# Altium PCB PCI Express_16765X6890_98PIN_Low profile.PCBDOC
Units mm, origin at the board's own origin, x right, y up, seen from the top; angles counter-clockwise.
Board outline 102.15 x 68.9 mm, 4 copper layers (TopLayer, InternalPlane1, InternalPlane2, BottomLayer); 17 components, 57 nets, 202 pads, 43 vias.
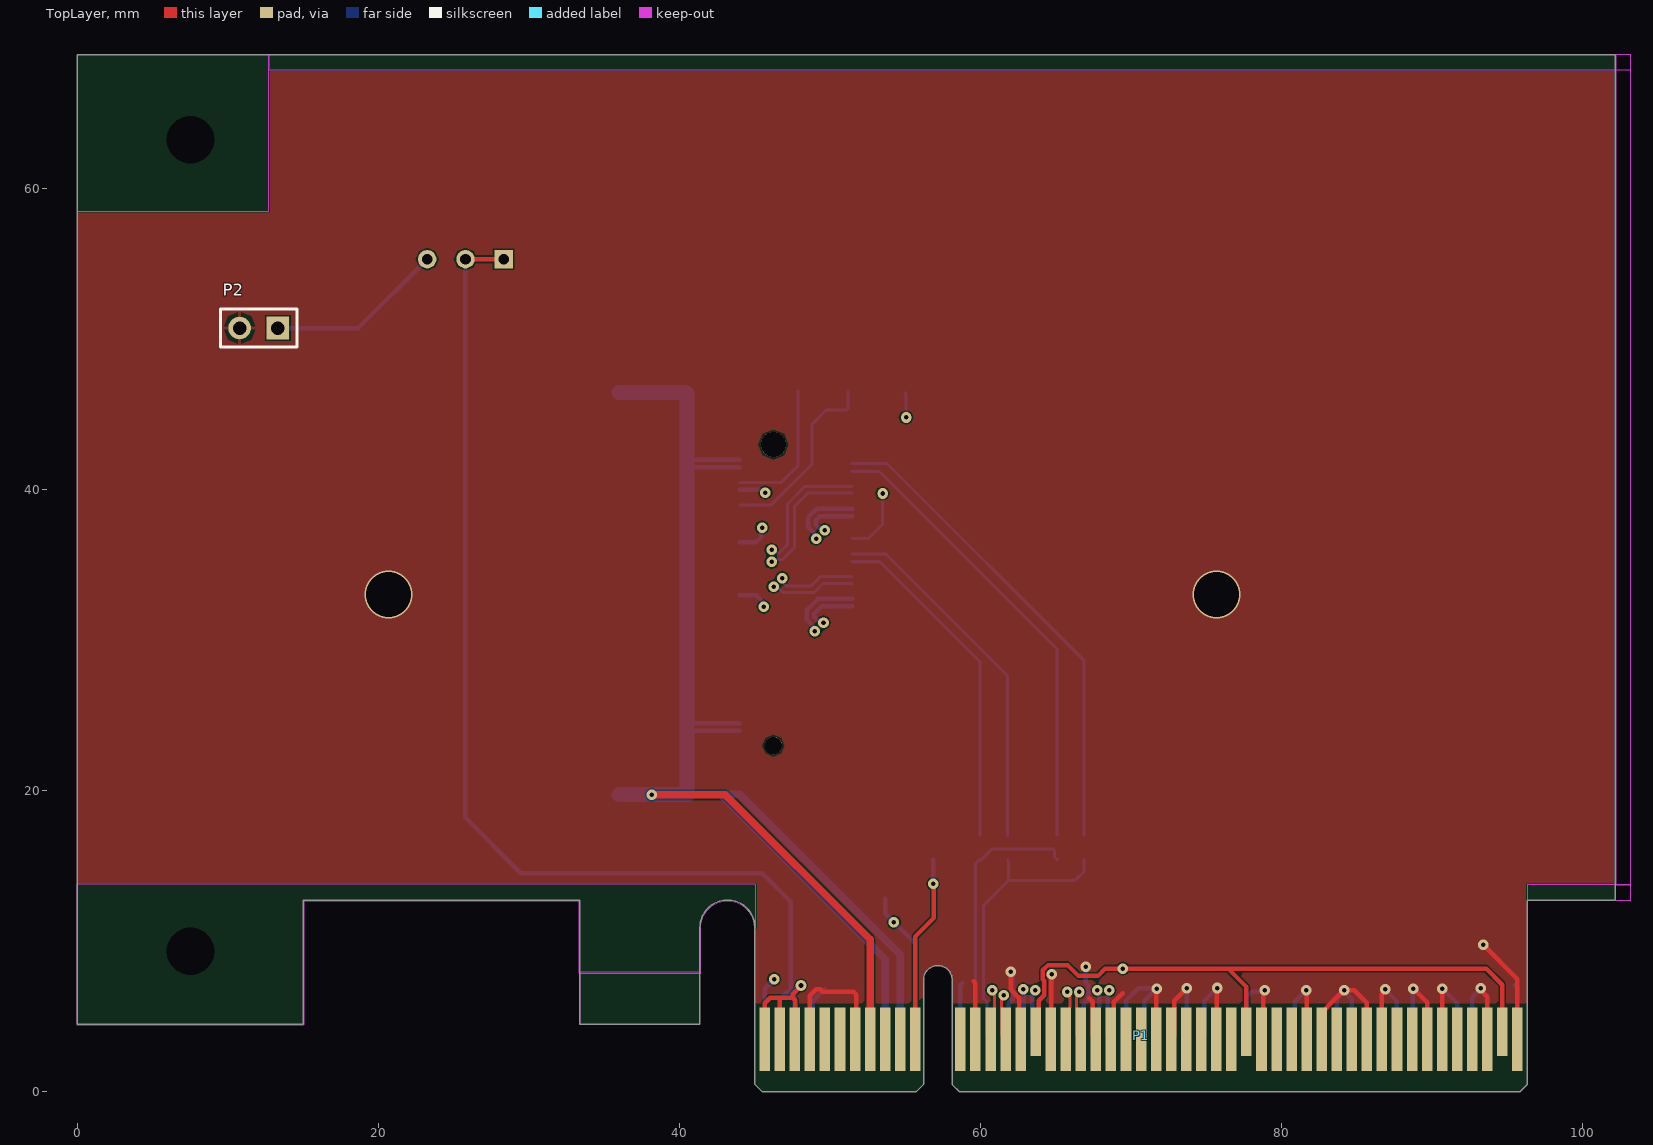
[diagram p0: TopLayer view]
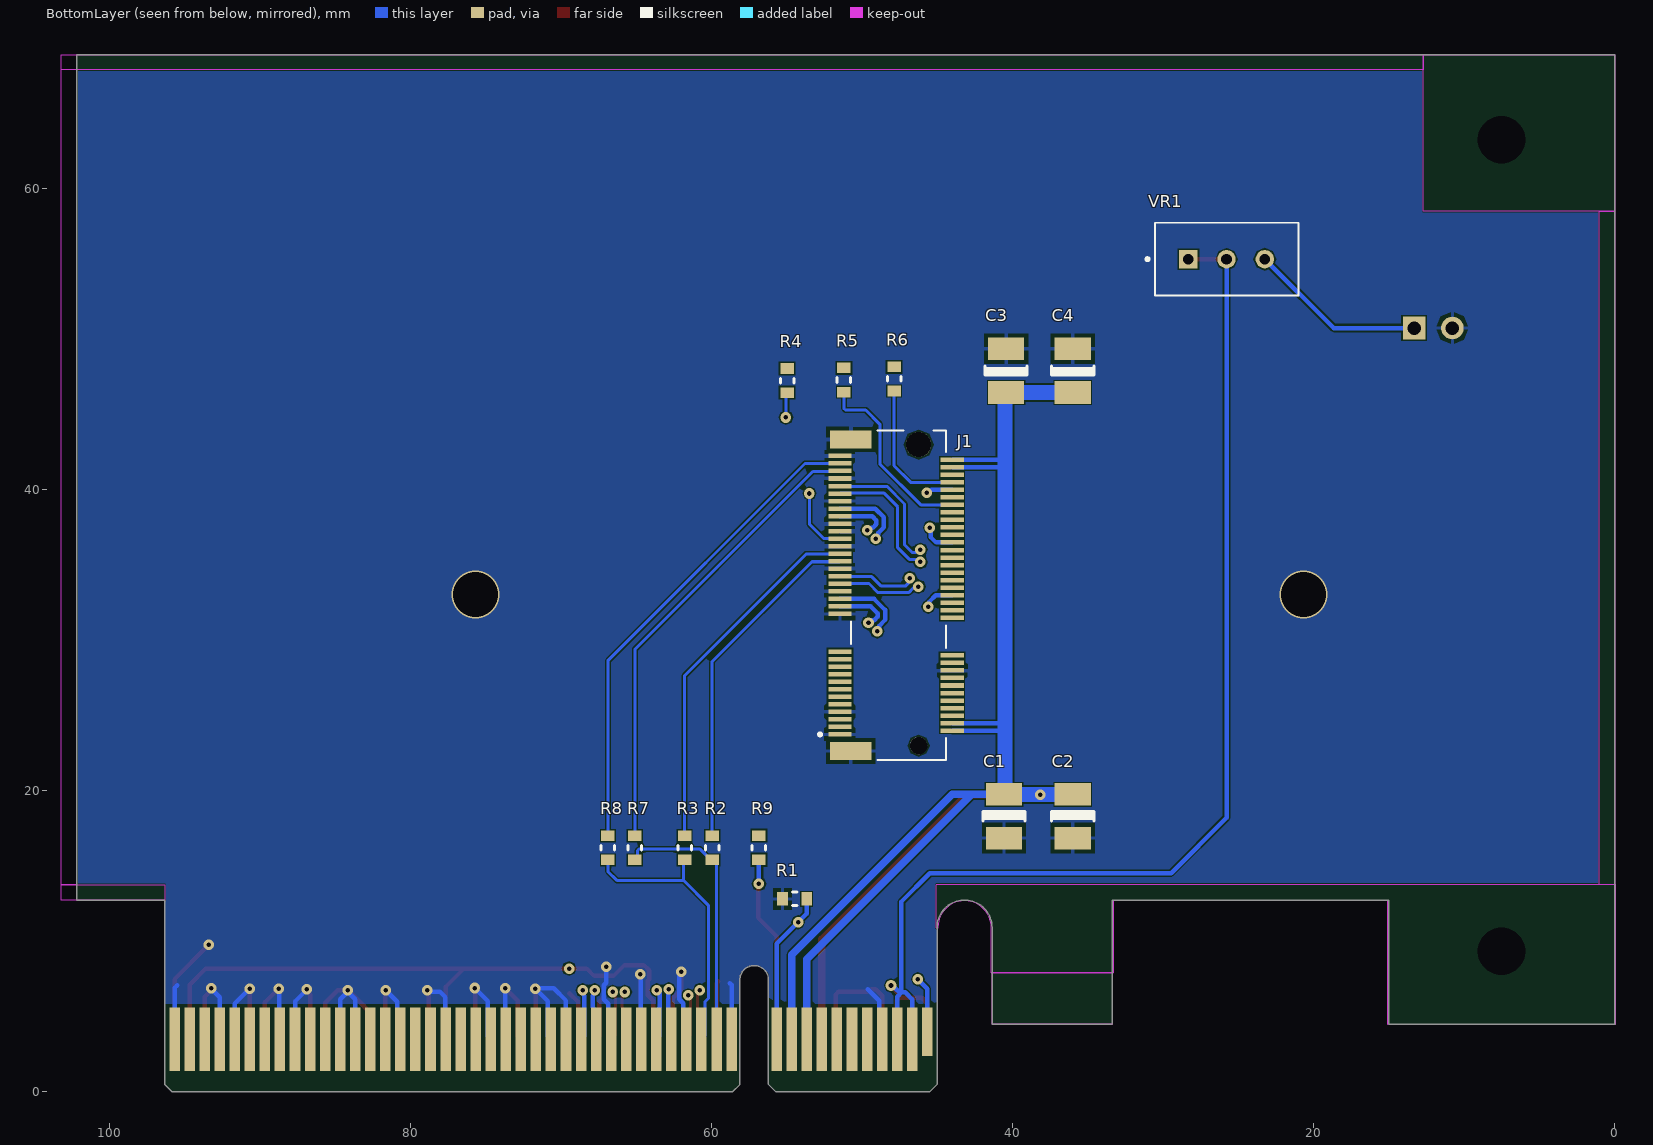
[diagram p1: BottomLayer view, seen from below]
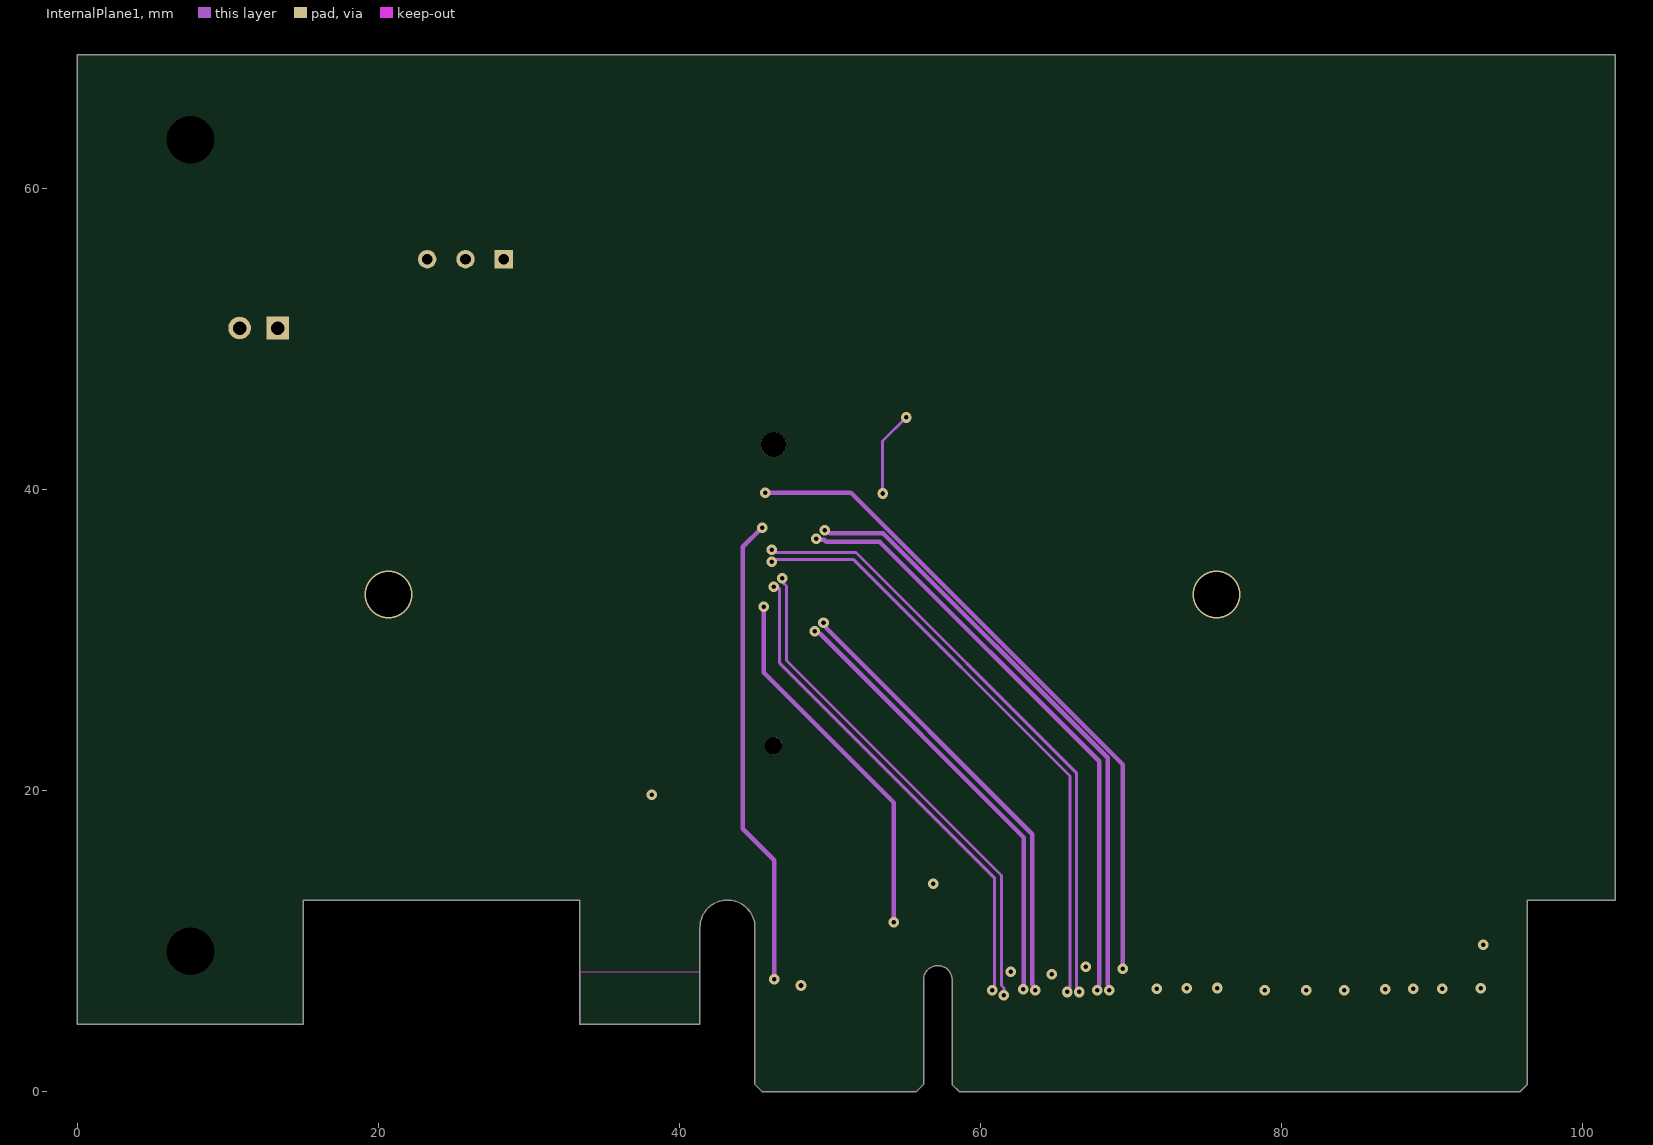
[diagram p2: InternalPlane1]
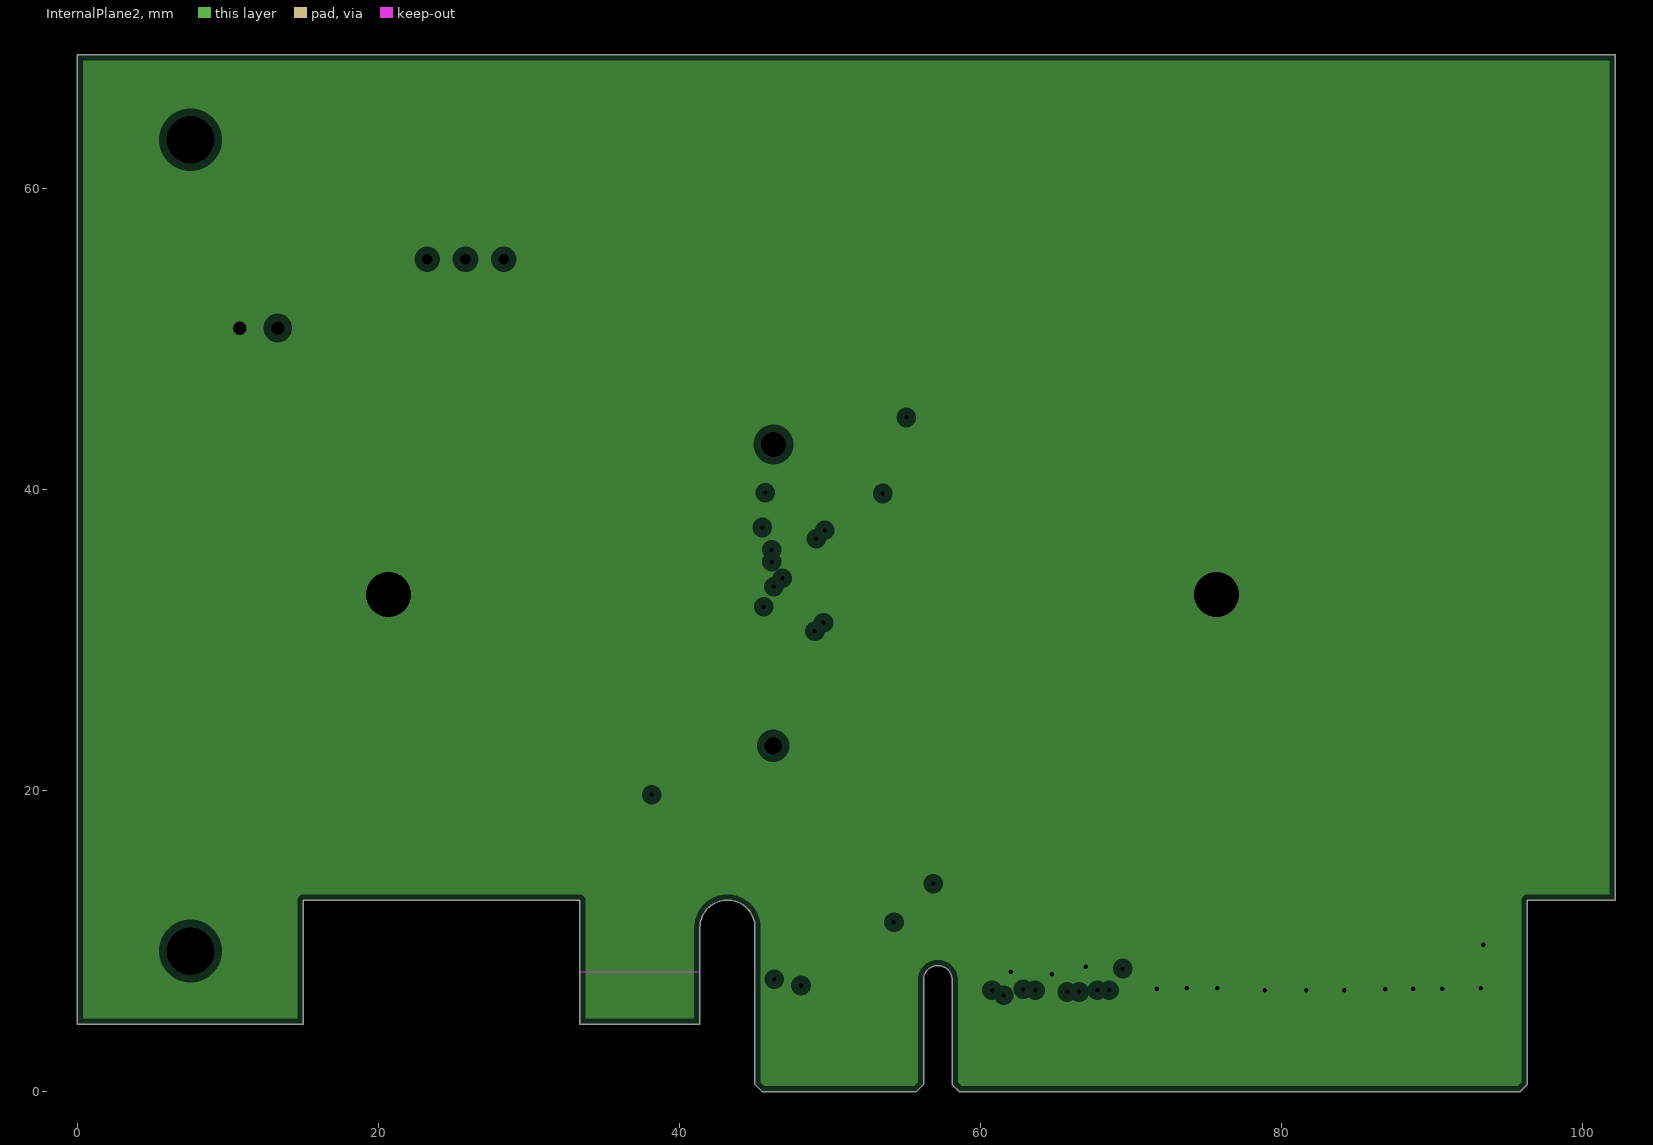
[diagram p3: InternalPlane2, clearances drawn from the general rule]
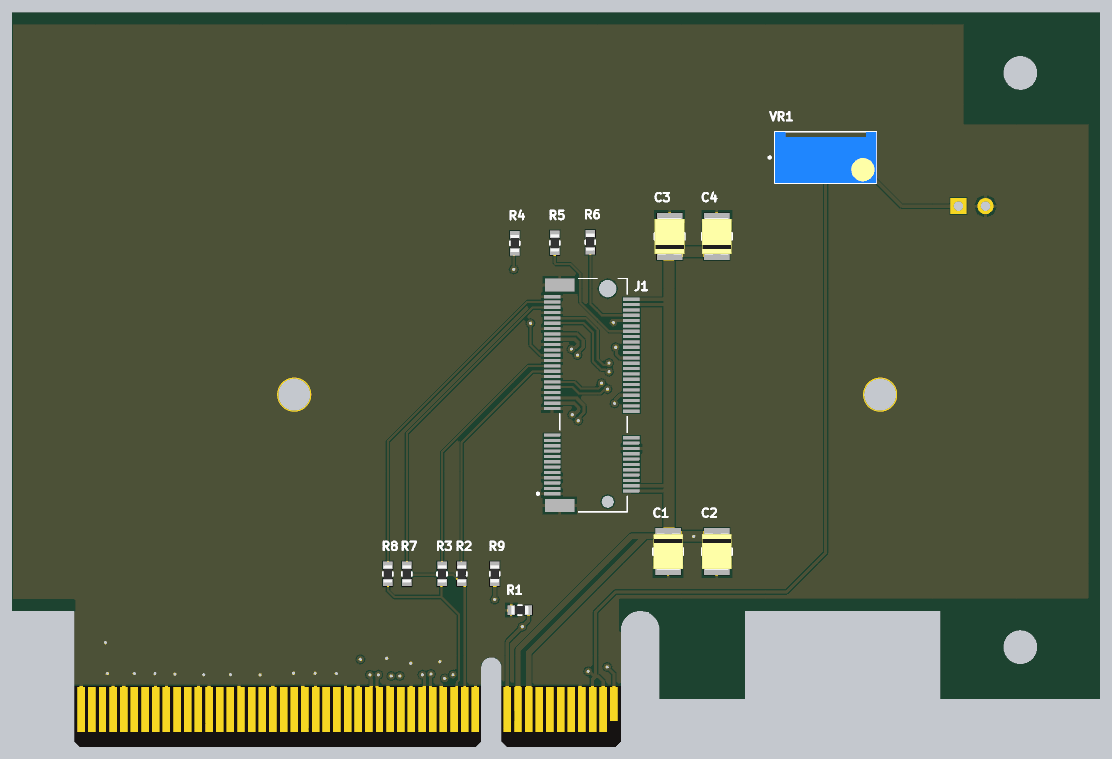
[diagram p4: 3D render of the assembled board from below, using the file's embedded part models]

## Layer stack, top to bottom
TopSolder: solder mask 0.01, Solder Resist, Dk 3.5
TopLayer: signal copper 0.018
Dielectric1: core 0.32, FR-4, Dk 4.8
InternalPlane1: signal copper 0.035
Dielectric2: prepreg 0.32, FR-4, Dk 4.8
InternalPlane2: plane copper 0.035, net GND
Dielectric3: core 0.32, FR-4, Dk 4.8
BottomLayer: signal copper 0.018
BottomSolder: solder mask 0.01, Solder Resist, Dk 3.5

## Board outline
0,4.5 15,4.5 15,12.75 33.35,12.75 33.35,4.5 41.35,4.5 41.35,10.925 cw(c43.175,10.925) 45,10.925 45,0.5 45.5,0 55.7,0 56.2,0.5 56.2,7.45 cw(c57.15,7.45) 58.1,7.45 58.1,0.5 58.6,0 95.8,0 96.3,0.5 96.3,12.75 102.15,12.75 102.15,68.9 0,68.9
cut-out: 131.214,21.723
cut-out: 124.387,5.143

## Design rules (kind name [scope] priority, off if disabled: settings)
Clearance [All] p1: gap=0.1 ignorepadtopadclearanceinfootprint=FALSE
DiffPairsRouting [All] p1: maxlimit=0.254 minlimit=0.2 mostfreqgap=0.254 toplayer_minwidth=0.15 toplayer_maxwidth=0.381 toplayer_prefwidth=0.381 midlayer1_minwidth=0.15 midlayer1_maxwidth=0.381 midlayer1_prefwidth=0.381 bottomlayer_minwidth=0.15 bottomlayer_maxwidth=0.381 bottomlayer_prefwidth=0.381 maxuncoupledlength=12.7
FabricationTestPointUsage TestPointUsage [All] p1: valid=0 allowmultiple=FALSE
FabricationTestpoint Testpoint [All] p1: side=3 testpointundercomponent=TRUE minsize=1.016 maxsize=2.54 preferedsize=1.524 minholesize=0.508 maxholesize=1.016 preferedholesize=0.813 testpointgrid=0.025 allowsidetop=TRUE allowsidebottom=TRUE usegrid=TRUE gridtolerance=0
Height "PCI Express, Page 84, \"Component Height Constraints\" for solder side" [OnBottomLayer] p1: minheight=0 maxheight=2.67 prefheight=2.67
Height "PCI Express, Page 84, \"Component Height Constraints\" for component side" [OnTopLayer] p2: minheight=0 maxheight=14.47 prefheight=14.47
MinimumSolderMaskSliver [All] p1: minsoldermaskwidth=0.08
PlaneClearance [All] p1: clearance=0.5
PlaneConnect [All] p1: planeconnectstyle=Relief reliefexpansion=0.508 reliefentries=4 reliefconductorwidth=0.254 reliefairgap=0.254
PolygonConnect [All] p1: connectstyle=Relief reliefconductorwidth=0.254 reliefentries=4 polygonreliefangle="90 Angle" airgapwidth=0.254
RoutingVias [All] p1: holewidth=0.711 width=1.27 viastyle="Through Hole" minholewidth=0.3 minwidth=0.7 maxholewidth=0.711 maxwidth=1.27
SilkToSolderMaskClearance SilkscreenOverComponentPads [IsPad] p1: minsilkscreentomaskgap=0.254 clearancetoexposedcopper=TRUE
SolderMaskExpansion [All] p1: expansion=0 istentingtop=FALSE
Width [All] p1: maxlimit=3 minlimit=0.15 preferedwidth=0.254
22 further rules are at their usual default settings.

## Classes and differential pairs
component class "PCI Express_16765X6890_98PIN_Low profile": C1 C2 C3 C4 J1 P2 R1 R2 R3 R4 R5 R6 R7 R8 R9 VR1
net class JTAG[1..5]: JTAG1 JTAG2 JTAG3 JTAG4 JTAG5
component class U_CON_PCI_Express_X8_98PIN: P1
component class "Edge Connector": P1
differential pair PET7: +PET7_P -PET7_N
differential pair PET6: +PET6_P -PET6_N
differential pair PET5: +PET5_P -PET5_N
differential pair PET4: +PET4_P -PET4_N
differential pair PET3: +PET3_P -PET3_N
differential pair PET2: +PET2_P -PET2_N
differential pair PET1: +PET1_P -PET1_N
differential pair PET0: +PET0_P -PET0_N
differential pair PER7: +PER7_P -PER7_N
differential pair PER6: +PER6_P -PER6_N
differential pair PER5: +PER5_P -PER5_N
differential pair PER4: +PER4_P -PER4_N
differential pair PER3: +PER3_P -PER3_N
differential pair PER2: +PER2_P -PER2_N
differential pair PER1: +PER1_P -PER1_N
differential pair PER0: +PER0_P -PER0_N

## Components (designator, comment, footprint, x,y, rotation, side; value= is the part's Value field where it differs from the comment)
C1 "TECAP B 10u 16V" "TECAP B" 40.55,18.315 r270 bottom
C2 "TECAP B 10u 16V" "TECAP B" 35.986,18.315 r270 bottom
C3 "TECAP B 10u 16V" "TECAP B" 40.412,47.911 r90 bottom
C4 "TECAP B 10u 16V" "TECAP B" 35.986,47.911 r90 bottom
J1 "SM3ZS067U310ABR1200" JAE_SM3ZS067U310ABR1200 47.975,33 r90 bottom
P1 "PCIeX8-GF-2D-1000-1K-O98" PCIeX8-GF-2D-1000-1K-O98 55.15,3.5 r0 top locked
P2 "Header 2" HDR1X2 13.307,50.745 r180 top
R1 "0603 10k" RESCHIP0603 54.469,12.821 r0 bottom
R2 "50 Ом" RESCHIP0603 59.935,16.22 r90 bottom
R3 "50 Ом" RESCHIP0603 61.774,16.22 r90 bottom
R4 "50 Ом" RESCHIP0603 54.955,47.258 r270 bottom
R5 "50 Ом" RESCHIP0603 51.195,47.293 r90 bottom
R6 "50 Ом" RESCHIP0603 47.857,47.363 r90 bottom
R7 "50 Ом" RESCHIP0603 65.081,16.22 r90 bottom
R8 "50 Ом" RESCHIP0603 66.868,16.22 r90 bottom
R9 "50 Ом" RESCHIP0603 56.843,16.225 r90 bottom
VR1 "3296W-1-103" TRIM_3296W-1-103 25.77,55.317 r180 bottom

## Footprints (in the part's own frame and the unit in brackets; to place one, negate y for a bottom-side part, rotate by r counter-clockwise, add the part's x,y. Pads: shape width x height; smd on the part's side, far side on the other; paste and mask are expansions set on the pad)
HDR1X2 [mm] "Connector; Header; 2 Position"
  rect 1.5x1.5 hole 0.9: 1(0,0)
  round 1.5 hole 0.9: 2(2.54,0)
  silkscreen extent -1.27,-1.27 3.81,1.27
JAE_SM3ZS067U310ABR1200 [mm]
  rect 0.3x1.55 smd: 1(-9.25,3.475) 2(-9,-3.975) 3(-8.75,3.475) 4(-8.5,-3.975) 5(-8.25,3.475) 6(-8,-3.975) 7(-7.75,3.475) 8(-7.5,-3.975) 9(-7.25,3.475) 10(-7,-3.975) 11(-6.75,3.475) 12(-6.5,-3.975) 13(-6.25,3.475) 14(-6,-3.975) 15(-5.75,3.475) 16(-5.5,-3.975) 17(-5.25,3.475) 18(-5,-3.975) 19(-4.75,3.475) 20(-4.5,-3.975) 21(-4.25,3.475) 22(-4,-3.975) 23(-3.75,3.475) 32(-1.5,-3.975) 33(-1.25,3.475) 34(-1,-3.975) 35(-0.75,3.475) 36(-0.5,-3.975) 37(-0.25,3.475) 38(0,-3.975) 39(0.25,3.475) 40(0.5,-3.975) 41(0.75,3.475) 42(1,-3.975) 43(1.25,3.475) 44(1.5,-3.975) 45(1.75,3.475) 46(2,-3.975) 47(2.25,3.475) 48(2.5,-3.975) 49(2.75,3.475) 50(3,-3.975) 51(3.25,3.475) 52(3.5,-3.975) 53(3.75,3.475) 54(4,-3.975) 55(4.25,3.475) 56(4.5,-3.975) 57(4.75,3.475) 58(5,-3.975) 59(5.25,3.475) 60(5.5,-3.975) 61(5.75,3.475) 62(6,-3.975) 63(6.25,3.475) 64(6.5,-3.975) 65(6.75,3.475) 66(7,-3.975) 67(7.25,3.475) 68(7.5,-3.975) 69(7.75,3.475) 70(8,-3.975) 71(8.25,3.475) 72(8.5,-3.975) 73(8.75,3.475) 74(9,-3.975) 75(9.25,3.475)
  rect 1.2x2.75 smd: S1(-10.35,2.75) S2(10.35,2.75)
  round 1.15 hole 1.15 unplated: ""(-10,-1.75)
  round 1.65 hole 1.65 unplated: ""(10,-1.75)
  silkscreen extent -10.95,-3.58 10.95,4.9
PCIeX8-GF-2D-1000-1K-O98 [mm] "Golden finger, PCIeX8, Dual, Opposite, Pitch 1mm, 98-Position"
  rect 0.7x3.2 smd far side paste-1: A1(-9.5,0.5)
  rect 0.7x4.2 smd far side paste-1: A2(-8.5,0) A3(-7.5,0) A4(-6.5,0) A5(-5.5,0) A6(-4.5,0) A7(-3.5,0) A8(-2.5,0) A9(-1.5,0) A10(-0.5,0) A11(0.5,0) A12(3.5,0) A13(4.5,0) A14(5.5,0) A15(6.5,0) A16(7.5,0) A17(8.5,0) A18(9.5,0) A19(10.5,0) A20(11.5,0) A21(12.5,0) A22(13.5,0) A23(14.5,0) A24(15.5,0) A25(16.5,0) A26(17.5,0) A27(18.5,0) A28(19.5,0) A29(20.5,0) A30(21.5,0) A31(22.5,0) A32(23.5,0) A33(24.5,0) A34(25.5,0) A35(26.5,0) A36(27.5,0) A37(28.5,0) A38(29.5,0) A39(30.5,0) A40(31.5,0) A41(32.5,0) A42(33.5,0) A43(34.5,0) A44(35.5,0) A45(36.5,0) A46(37.5,0) A47(38.5,0) A48(39.5,0) A49(40.5,0)
  rect 0.7x4.2 smd paste-1: B1(-9.5,0) B2(-8.5,0) B3(-7.5,0) B4(-6.5,0) B5(-5.5,0) B6(-4.5,0) B7(-3.5,0) B8(-2.5,0) B9(-1.5,0) B10(-0.5,0) B11(0.5,0) B12(3.5,0) B13(4.5,0) B14(5.5,0) B15(6.5,0) B16(7.5,0) B18(9.5,0) B19(10.5,0) B20(11.5,0) B21(12.5,0) B22(13.5,0) B23(14.5,0) B24(15.5,0) B25(16.5,0) B26(17.5,0) B27(18.5,0) B28(19.5,0) B29(20.5,0) B30(21.5,0) B32(23.5,0) B33(24.5,0) B34(25.5,0) B35(26.5,0) B36(27.5,0) B37(28.5,0) B38(29.5,0) B39(30.5,0) B40(31.5,0) B41(32.5,0) B42(33.5,0) B43(34.5,0) B44(35.5,0) B45(36.5,0) B46(37.5,0) B47(38.5,0) B49(40.5,0)
  rect 0.7x3.2 smd paste-1: B17(8.5,0.5) B31(22.5,0.5) B48(39.5,0.5)
RESCHIP0603 [mm] "Chip Resistor, 2-Leads, Body 1,6x0,8mm"
  rect 0.7x0.9 smd mask+0.06: 1(-0.8,0) 2(0.8,0)
  silkscreen extent -0.15,-0.45 0.15,0.45, body extent -0.8,-0.4 0.8,0.4, height 0.4
"TECAP B" [mm] "Chip Capacitor, 2-Leads, Body 3,5x2,8mm"
  rect 1.5x2.4 smd mask+0.06: 1(-1.45,0) 2(1.45,0)
  silkscreen extent -0.3,-1.4 0.3,1.4, body extent -1.75,-1.4 1.75,1.4, height 1.92
TRIM_3296W-1-103 [mm]
  rect 1.218x1.218 hole 0.71: 1(-2.54,0)
  round 1.218 hole 0.71: 2(0,0) 3(2.54,0)
  silkscreen extent -5.35,-2.41 4.76,2.42, body extent -4.77,-2.42 4.76,2.41, height 11.55

## Part data
C1 C2 C3 C4: library part "Cap T", "Solid Tantalum Surface Mount Capacitors", Voltage=16V, Type="TECAP B"
J1: "67 Position Female Connector M.2 (NGFF) Mini Card Gold 0.020 (0.50mm)", Package=None, Availability=Warning, Check_prices=https://www.snapeda.com/parts/SM3ZS067U310ABR1200/JAE%20Electronics/view-part/652226/?ref=eda, MF="JAE Electronics", MP=SM3ZS067U310ABR1200, Price=None, Purchase-URL=https://pricing.snapeda.com/search/part/SM3ZS067U310ABR1200/?ref=eda, SnapEDA_Link=https://www.snapeda.com/parts/SM3ZS067U310ABR1200/JAE%20Electronics/view-part/652226/?ref=snap
P1: library part CMP-0001-00032-2, "Golden finger, PCIeX8, Dual, Opposite, Pitch 1mm, 98-Position", ClassName="Edge Connector", Datasheet Version="rev2.0, Apr-2007", Mating Connector=Molex-87715-9205, Package Reference=PCIeX8-GF-2D-1000-1K-O98, Publisher=Altium
P2: "Header, 2-Pin", LatestRevisionDate=17-Jul-2002, LatestRevisionNote="Re-released for DXP Platform.", Publisher="Altium Limited"
R1: library part Res, "Resistor", Power_W=0,065, Tolerance_Percent=5, Body=0603, Class="Электронные компоненты", Installation=SMD, Ordering_Information="0603, 10k, 5%", Pins=2, SubClass=Резисторы
R2 R3 R4 R5 R6 R7 R8 R9: library part Res, "Резистор SMD R0603", Tolerance=%, PWR=Value, Type=0603
VR1: "10 kOhms 0,5W, 1 / 2W PC Pinos atravÃ©s de orifÃ­cio e aparador de potenciÃ´metro Cermet 25 Ajuste superior", Package="SOT-23-5 Bourns", Availability=Warning, Check_prices=https://www.snapeda.com/parts/3296W-1-103/Bourns/view-part/421595/?ref=eda, MF=Bourns, MP=3296W-1-103, Price=None, Purchase-URL=https://pricing.snapeda.com/search/part/3296W-1-103/?ref=eda, SnapEDA_Link=https://www.snapeda.com/parts/3296W-1-103/Bourns/view-part/421595/?ref=snap

## Free pads (board coordinates)
  round 2.88 hole 3.18 unplated: MH1(7.5,9.35) MH2(7.5,63.25)

## Via types
v1: diameter 0.7, hole 0.3, TopLayer to BottomLayer, tented both sides, 41 vias
v2: diameter 3.2, hole 3, TopLayer to BottomLayer, 2 vias

## Nets (pads, with @x,y where several pads share a name; then routed paths per layer and width w, separated by ;. In a path a pad name is that pad's centre, name@x,y a point inside that pad or via, vN(x,y) a via of type N, cw(c..) or ccw(c..) an arc to the next point about the centre after c; other vN are vias at no path point)
3.3VAUX: P1.B10
+3.3V: C1.1 C2.1 C3.1 C4.1 J1.2 J1.4 J1.72 J1.74 P1.A9 P1.A10 P1.B8 | length 122
  TopLayer w0.5: v1(38.151,19.738) 43.039,19.738 52.65,10.127 P1.B8
  BottomLayer w0.3: 40.481,23.99 40.491,24 J1.2 ; 40.481,24.534 40.515,24.5 J1.4 ; 40.481,41.507 40.488,41.5 J1.72 ; 40.481,42.019 40.5,42 J1.74
  BottomLayer w0.5: C2.1 36.013,19.738 v1(38.151,19.738) ; C1.1 42.709,19.765 ; P1.A9 53.65,8.824 42.709,19.765 ; P1.A10 54.65,9.105 43.99,19.765 42.709,19.765
  BottomLayer w1: C2.1 C1.1 40.481,19.834 40.481,23.99 40.481,24.534 40.481,41.507 40.481,42.019 40.481,46.392 C3.1 C4.1
+12V: P1.A2 P1.A3 P1.B1 P1.B2 P1.B3 VR1.1 VR1.2 | length 88.4
  TopLayer w0.3: VR1.2 VR1.1 ; P1.B1 45.65,5.899 46.018,6.267 46.766,6.267 ; P1.B2 46.65,6.151 46.766,6.267 ; P1.B3 47.689,3.539 47.689,6.091 47.513,6.267 ; v1(48.061,7.072) 48.061,7.036 47.513,6.488 47.513,6.267 ; 46.766,6.267 47.513,6.267
  BottomLayer w0.3: VR1.2 25.77,18.222 29.454,14.538 45.479,14.538 47.366,12.651 47.366,6.729 47.366,6.613 ; P1.A2 46.65,6.145 47.118,6.613 47.366,6.613 ; P1.A3 47.65,6.329 47.366,6.613 ; v1(48.061,7.072) 47.953,7.072 47.61,6.729 47.483,6.729 47.366,6.613
GND: C1.2 C2.2 C3.2 C4.2 J1.1 J1.7 J1.18 J1.33 J1.39 J1.45 J1.51 J1.55 J1.57 J1.63 J1.69 J1.75 J1.S1 J1.S2 P1.A4 P1.A12 P1.A15 P1.A18 P1.A20 P1.A23 P1.A24 P1.A27 P1.A28 P1.A31 P1.A34 P1.A37 P1.A38 P1.A41 P1.A42 P1.A45 P1.A46 P1.A49 P1.B4 P1.B7 P1.B13 P1.B16 P1.B18 P1.B21 P1.B22 P1.B25 P1.B26 P1.B29 P1.B32 P1.B35 P1.B36 P1.B39 P1.B40 P1.B43 P1.B44 P1.B47 P1.B49 P2.2 R1.2 | length 145.8
  TopLayer w0.3: P1.B4 48.65,6.382 49.08,6.812 49.328,6.812 49.499,6.641 51.563,6.641 51.739,6.465 51.739,3.589 P1.B7 ; 59.536,7.347 59.65,7.233 P1.B13 ; v1(61.979,7.992) 61.979,6.817 62.569,6.227 62.569,3.581 P1.B16 ; P1.B18 64.684,3.535 64.684,7.798 v1(64.719,7.833) ; 67.207,6.238 67.45,5.995 67.45,3.7 P1.B21 ; P1.B22 68.85,3.7 68.85,5.983 69.431,6.564 ; P1.B25 71.672,3.522 71.672,6.848 v1(71.694,6.87) ; P1.B26 72.85,3.7 72.85,6.048 v1(73.689,6.887) ; P1.B29 75.684,3.534 75.684,6.871 v1(75.718,6.905) ; P1.B32 78.78,3.63 78.78,6.671 v1(78.857,6.748) ; v1(81.631,6.766) 81.64,6.757 81.64,3.51 P1.B35 ; P1.B36 82.65,5.25 83.05,5.65 83.05,5.704 84.112,6.766 84.813,6.766 85.25,6.329 85.65,5.929 P1.B39 ; P1.B40 86.65,6.494 86.856,6.7 v1(86.856,6.808) ; v1(88.726,6.869) 89.65,5.945 P1.B43 ; P1.B44 90.653,3.503 90.653,6.866 v1(90.656,6.869) ; v1(93.204,6.877) 93.204,6.769 93.65,6.323 P1.B47 ; v1(93.375,9.773) 95.65,7.498 P1.B49
  BottomLayer w0.3: P1.A4 48.835,3.685 48.835,6.05 49.598,6.813 ; P1.A12 58.65,7.106 58.766,7.222 ; P1.A15 61.85,3.7 61.85,5.883 62.133,6.166 62.133,7.838 v1(61.979,7.992) ; P1.A18 64.684,3.535 64.684,7.798 v1(64.719,7.833) ; P1.A20 66.85,3.7 66.85,5.855 67.148,6.153 67.148,7.09 66.979,7.259 v1(66.979,8.304) ; P1.A23 69.65,6.074 70.463,6.887 71.677,6.887 v1(71.694,6.87) 70.85,6.026 70.85,3.7 P1.A24 ; P1.A27 73.67,3.52 73.67,6.868 v1(73.689,6.887) ; P1.A28 74.85,3.7 74.85,6.037 v1(75.718,6.905) ; P1.A31 77.666,3.516 77.666,6.303 78.034,6.671 78.78,6.671 v1(78.857,6.748) ; P1.A34 80.85,3.7 80.85,5.985 v1(81.631,6.766) ; P1.A37 83.65,6.162 v1@84.146,6.658 ; v1(84.146,6.766) v1@84.146,6.658 ; P1.A38 84.65,6.154 v1@84.146,6.658 ; v1(86.856,6.808) 87.65,6.014 P1.A41 ; P1.A42 88.688,3.538 88.688,6.831 v1(88.726,6.869) ; v1(90.656,6.869) 91.65,5.875 P1.A45 ; P1.A46 92.65,6.3 93.204,6.854 v1(93.204,6.877) ; 95.478,7.082 95.65,6.91 P1.A49
  other v2: 20.652,33.052 75.652,33.052
JTAG1: P1.B9
JTAG2: P1.A5
JTAG3: P1.A6
JTAG4: P1.A7
JTAG5: P1.A8
NetJ1_47: J1.47 R2.2 | length 22.8
  BottomLayer w0.2: J1.47 51.48,35.22 53.308,35.22 59.935,28.593 R2.2
NetJ1_49: J1.49 R3.2 | length 24.3
  BottomLayer w0.2: J1.49 53.674,35.75 61.774,27.65 R3.2
NetJ1_53: J1.53 R4.2 | length 11.9
  InternalPlane1 w0.2: v1(53.477,39.754) 53.477,43.235 v1(55.045,44.803)
  BottomLayer w0.2: J1.53 52.516,36.75 53.477,37.711 v1(53.477,39.754) ; R4.2 55.045,46.368 v1(55.045,44.803)
NetJ1_62: J1.62 R5.1 | length 12.5
  BottomLayer w0.2: J1.62 46.081,39 48.801,41.72 48.801,44.359 49.74,45.298 51.078,45.298 51.195,45.415 R5.1
NetJ1_68: J1.68 R6.1 | length 9.3
  BottomLayer w0.2: J1.68 46.756,40.5 47.859,41.603 47.859,44.08 47.857,44.082 R6.1
NetJ1_71: J1.71 R7.2 | length 30.9
  BottomLayer w0.2: J1.71 51.478,41.222 53.253,41.222 65.081,29.394 R7.2
NetJ1_73: J1.73 R8.2 | length 32.5
  BottomLayer w0.2: J1.73 53.767,41.75 66.868,28.649 R8.2
NetP2_1: P2.1 VR1.3 | length 11.8
  BottomLayer w0.3: P2.1 18.658,50.745 VR1.3
PER0_N: J1.35 P1.A17 | length 37
  InternalPlane1 w0.3: 49.733,30.82 63.427,17.126 63.427,7.13 63.473,7.083 63.473,6.831 63.55,6.754 v1(63.621,6.754)
  BottomLayer w0.3: v1(49.555,31.173) 49.446,31.173 49.287,31.332 49.183,31.332 48.955,31.561 48.955,31.809 49.396,32.25 J1.35 ; v1(63.621,6.754) 63.427,6.56 63.427,5.874 63.427,5.626 63.45,5.603 63.45,3.7 P1.A17
PER0_P: J1.37 P1.A16 | length 37.6
  InternalPlane1 w0.3: 49.342,30.428 62.873,16.897 62.873,7.13 62.827,7.083 62.827,6.831 62.821,6.836 v1(62.821,6.824)
  BottomLayer w0.3: v1(48.989,30.607) 48.989,30.715 48.829,30.875 48.829,30.979 48.455,31.353 48.455,32.016 49.188,32.75 J1.37 ; P1.A16 62.85,3.7 62.85,5.603 62.873,5.626 62.873,6.104 v1@62.873,6.824
PER1_N: J1.59 P1.A22 | length 47.5
  InternalPlane1 w0.3: v1(49.63,37.327) 49.738,37.327 49.955,37.109 53.509,37.109 68.427,22.191 68.427,7.128 68.473,7.081 68.473,6.829 v1(68.55,6.752)
  BottomLayer w0.3: v1(49.63,37.327) 49.521,37.327 49.362,37.486 49.258,37.486 49.03,37.715 49.03,37.963 49.317,38.25 J1.59 ; v1(68.55,6.752) 68.473,6.675 68.473,6.423 68.427,6.376 68.427,5.874 68.427,5.626 68.45,5.603 68.45,3.7 P1.A22
PER1_P: J1.61 P1.A21 | length 48.4
  InternalPlane1 w0.3: v1(49.064,36.761) 49.141,36.684 49.597,36.684 49.726,36.555 53.28,36.555 67.873,21.962 67.873,7.128 67.827,7.081 67.827,6.829 v1(67.75,6.752)
  BottomLayer w0.3: v1(49.064,36.761) 49.064,36.869 48.904,37.029 48.904,37.133 48.53,37.507 48.53,38.17 49.109,38.75 J1.61 ; P1.A21 67.85,3.7 67.85,5.603 67.873,5.626 67.873,6.104 67.873,6.376 67.827,6.423 67.827,6.675 v1(67.75,6.752)
PER2_N: P1.A26
PER2_P: P1.A25
PER3_N: P1.A30
PER3_P: P1.A29
PER4_N: P1.A36
PER4_P: P1.A35
PER5_N: P1.A40
PER5_P: P1.A39
PER6_N: P1.A44
PER6_P: P1.A43
PER7_N: P1.A48
PER7_P: P1.A47
PERST#: J1.38 P1.A11 R1.1 | length 36.7
  InternalPlane1 w0.3: v1(45.583,32.231) 45.583,27.86 54.237,19.206 v1(54.237,11.272)
  BottomLayer w0.3: J1.38 45.085,33 45.506,32.579 45.506,32.308 v1(45.583,32.231) ; R1.1 53.669,11.84 v1(54.237,11.272) 55.65,9.859 P1.A11
PET0_N: J1.43 P1.B15 | length 42.6
  TopLayer w0.2: v1(61.533,6.415) 61.533,6.611 61.55,6.628 61.377,6.455 61.377,5.8 61.377,5.617 61.4,5.594 61.4,3.75 P1.B15
  InternalPlane1 w0.2: v1(46.811,34.132) 46.907,34.036 46.907,33.792 47.095,33.603 47.095,28.667 61.377,14.385 61.377,7.071 61.55,6.898 61.533,6.881 v1(61.533,6.415)
  BottomLayer w0.2: v1(46.811,34.132) 46.907,34.036 46.907,33.792 47.077,33.621 48.734,33.621 49.34,34.227 51.427,34.227 J1.43
PET0_P: J1.41 P1.B14 | length 42.2
  TopLayer w0.2: P1.B14 60.9,3.75 60.9,5.594 60.923,5.617 60.923,5.988 60.923,6.455 60.75,6.628 v1(60.75,6.763)
  InternalPlane1 w0.2: v1(46.245,33.566) 46.341,33.47 46.585,33.47 46.641,33.415 46.641,28.479 60.923,14.197 60.923,7.071 60.75,6.898 v1(60.75,6.763)
  BottomLayer w0.2: v1(46.245,33.566) 46.341,33.47 46.585,33.47 46.889,33.167 48.922,33.167 49.528,33.773 51.409,33.773 J1.41@51.45,33.732
PET1_N: J1.67 P1.B20 | length 52.4
  TopLayer w0.2: 66.377,6.333 66.377,5.8 66.377,5.617 66.4,5.594 66.4,3.75 P1.B20
  InternalPlane1 w0.2: 46.412,35.837 51.716,35.837 66.377,21.176 66.377,6.947 66.548,6.776 v1(66.548,6.641)
  BottomLayer w0.2: v1(46.104,36.01) 46.239,36.01 46.412,35.837 46.654,35.837 47.16,36.343 47.16,39.058 48.329,40.227 51.427,40.227 J1.67
PET1_P: J1.65 P1.B19 | length 51.7
  TopLayer w0.2: P1.B19 65.9,3.75 65.9,5.594 65.923,5.617 65.923,5.988 65.923,6.333
  InternalPlane1 w0.2: 46.412,35.383 51.528,35.383 65.923,20.988 65.923,6.949 65.748,6.774 v1(65.748,6.641)
  BottomLayer w0.2: v1(46.104,35.21) 46.239,35.21 46.412,35.383 46.842,35.383 47.614,36.155 47.614,38.87 48.517,39.773 51.427,39.773 J1.65
PET2_N: P1.B24
PET2_P: P1.B23
PET3_N: P1.B28
PET3_P: P1.B27
PET4_N: P1.B34
PET4_P: P1.B33
PET5_N: P1.B38
PET5_P: P1.B37
PET6_N: P1.B42
PET6_P: P1.B41
PET7_N: P1.B46
PET7_P: P1.B45
PRSNT1#: J1.52 P1.A1 | length 37.4
  InternalPlane1 w0.3: v1(45.481,37.493) 44.2,36.212 44.2,17.476 46.276,15.4 v1(46.276,7.49)
  BottomLayer w0.3: J1.52 45.069,36.5 45.404,36.835 45.404,37.416 v1(45.481,37.493) ; P1.A1 45.65,6.864 v1(46.276,7.49)
PRSNT2#: J1.66 P1.B17 P1.B31 P1.B48 | length 90.4
  TopLayer w0.3: P1.B17 63.85,4.2 63.85,6.05 64.23,6.43 64.23,7.373 64.119,7.484 64.119,8.082 64.47,8.433 65.764,8.433 66.493,7.704 67.787,7.704 68.282,8.199 76.426,8.199 ; P1.B31 77.65,6.975 76.426,8.199 ; P1.B48 94.65,7.119 93.57,8.199 76.426,8.199
  InternalPlane1 w0.3: v1(45.696,39.815) 51.369,39.815 69.446,21.738 v1(69.446,8.199)
  BottomLayer w0.3: J1.66 45.403,40 45.588,39.815 v1(45.696,39.815)
REFCLK+: P1.A13 R2.1 R7.1 | length 18.1
  BottomLayer w0.2: P1.A13 59.65,15.17 59.9,15.42 R2.1 60.035,15.42 60.767,16.152 64.777,16.152 64.894,16.035 64.894,15.607 R7.1
REFCLK-: P1.A14 R3.1 R8.1 | length 18.9
  BottomLayer w0.2: P1.A14 60.4,3.75 60.4,6.007 60.192,6.215 60.192,12.401 61.846,14.055 ; R3.1 61.846,15.348 61.846,14.055 ; R8.1 R8.1 66.867,14.648 66.274,14.055 61.846,14.055
SMCLK: P1.B5
SMDAT: P1.B6
WAKE#: P1.B11 R9.1 | length 12.5
  TopLayer w0.3: P1.B11 55.65,10.326 56.881,11.557 56.881,13.775 v1(56.832,13.824)
  BottomLayer w0.3: v1(56.832,13.824) 56.832,15.414 R9.1
pads on no net: J1. J1.3 J1.5 J1.6 J1.8 J1.9 J1.10 J1.11 J1.12 J1.13 J1.14 J1.15 J1.16 J1.17 J1.19 J1.20 J1.21 J1.22 J1.23 J1.32 J1.34 J1.36 J1.40 J1.42 J1.44 J1.46 J1.48 J1.50 J1.54 J1.56 J1.58 J1.60 J1.64 J1.70 P1.A19 P1.A32 P1.A33 P1.B12 P1.B30 R4.1 R5.2 R6.2 R9.2

## Polygon pours and split planes (outlines as drawn)
GND on TopLayer "NONET_L-01_P-001" (solid, remove dead copper, pour order 0): 45,5.879 45,13.8 0,13.8 0,58.5 12.7,58.5 12.7,68.9 102.167,68.9 102.186,68.919 102.186,12.751 96.301,12.749 96.3,5.878
GND on BottomLayer "NONET_L-01_P-001" (solid, remove dead copper, pour order 1): 44.999,5.857 44.999,13.799 -0.001,13.799 -0.001,58.499 12.699,58.499 12.699,68.899 102.166,68.899 102.185,68.918 102.185,12.75 96.3,12.748 96.299,5.856
GND on InternalPlane2 (split plane): 185 vertices, not listed, extent 0.383,0.383 101.767,68.517

## Keep-outs
TopLayer:
  rectangle: 96.3,12.75 103.167,13.75
  rectangle: 0,58.5 12.7,68.9
  rectangle: 12.7,67.9 103.167,68.9
  rectangle: 102.167,13.75 103.167,68.9
  region: 0,4.45 15,4.45 ccw(c15,4.5) 15.05,4.5 15.05,12.7 33.3,12.7 33.3,7.95 ccw(c33.35,7.95) 33.35,7.9 41.35,7.9 ccw(c41.35,7.95) 41.4,7.95 ccw(c41.35,7.95) 41.4,7.951 41.4,10.925 cw(c43.175,10.925) 44.95,10.925 ccw(c45,10.925) 45.05,10.925 45.05,13.75 ccw(c45,13.75) 45,13.8 0,13.8 ccw(c0,13.75) -0.05,13.75 -0.05,4.5 ccw(c0,4.5)
BottomLayer:
  rectangle: 96.3,12.75 103.167,13.75
  rectangle: 102.167,13.75 103.167,68.9
  rectangle: 12.7,67.9 103.167,68.9
  rectangle: 0,58.5 12.7,68.9
  rectangle: 0,13.75 1,58.5
  region: 0,4.45 15,4.45 ccw(c15,4.5) 15.05,4.5 15.05,12.7 33.3,12.7 33.3,7.95 ccw(c33.35,7.95) 33.35,7.9 41.35,7.9 ccw(c41.35,7.95) 41.4,7.95 ccw(c41.35,7.95) 41.4,7.951 41.4,10.925 cw(c43.175,10.925) 44.95,10.925 ccw(c45,10.925) 45.05,10.925 45.05,13.75 ccw(c45,13.75) 45,13.8 0,13.8 ccw(c0,13.75) -0.05,13.75 -0.05,4.5 ccw(c0,4.5)
TopSolder:
  rectangle: 33.35,4.5 41.35,7.95
BottomSolder:
  rectangle: 33.35,4.5 41.35,7.95
KeepOutLayer:
  rectangle: 33.35,4.5 41.35,7.95

## Other copper
TopLayer:
  pour cut-out: 56.189,5.709 56.189,7.841 56.745,8.397 57.551,8.397 58.109,7.839 58.109,5.708
BottomLayer:
  pour cut-out: 56.189,5.709 56.189,7.841 56.745,8.397 57.551,8.397 58.109,7.839 58.109,5.708

## Silkscreen, mask and mechanical layers (free items; w line width, h text height)
PCI-SIG Outline:
  the board outline again, w0.1
PCI-SIG Notes:
  text "- Nominal values used, dimensions in mm" at 171.25,18 h0.8
  text "- The mounting holes and keep-out areas around them are only required when the I/O bracket is mounted on the card directly" at 171.25,16.75 h0.8
  text "- Component height rule and clearance rule derived from PCI_Express_CEM_r2.0.pdf, Page 84." at 171.25,15.5 h0.8
  text "- Stackup is not specified in PCI_Express_CEM_r2.0.pdf, nor implemented in this template." at 171.25,14.25 h0.8
Mechanical7:
  lines w0.1: 0,4.5 0,13.75 45,13.75 45,10.925 ccw(c43.175,10.925) 41.35,10.925 41.35,7.95 33.35,7.95 33.35,12.75 15,12.75 15,4.5 0,4.5

## Dimensions
0,68.9 to 102.15,12.75 on PCI-SIG Dimensions
0,4.5 to 0,68.9 on PCI-SIG Dimensions
0,0 to 0,68.9 on PCI-SIG Dimensions